# Altium PCB mainPCB.PcbDoc
Units mil, origin at the board's own origin, x right, y up, seen from the top; angles counter-clockwise.
Board outline 2370 x 3135 mil, 4 copper layers (Top Layer, +5, GND, Bottom Layer), stack 21.664 mil thick; 40 components, 38 nets, 179 pads, 68 vias.
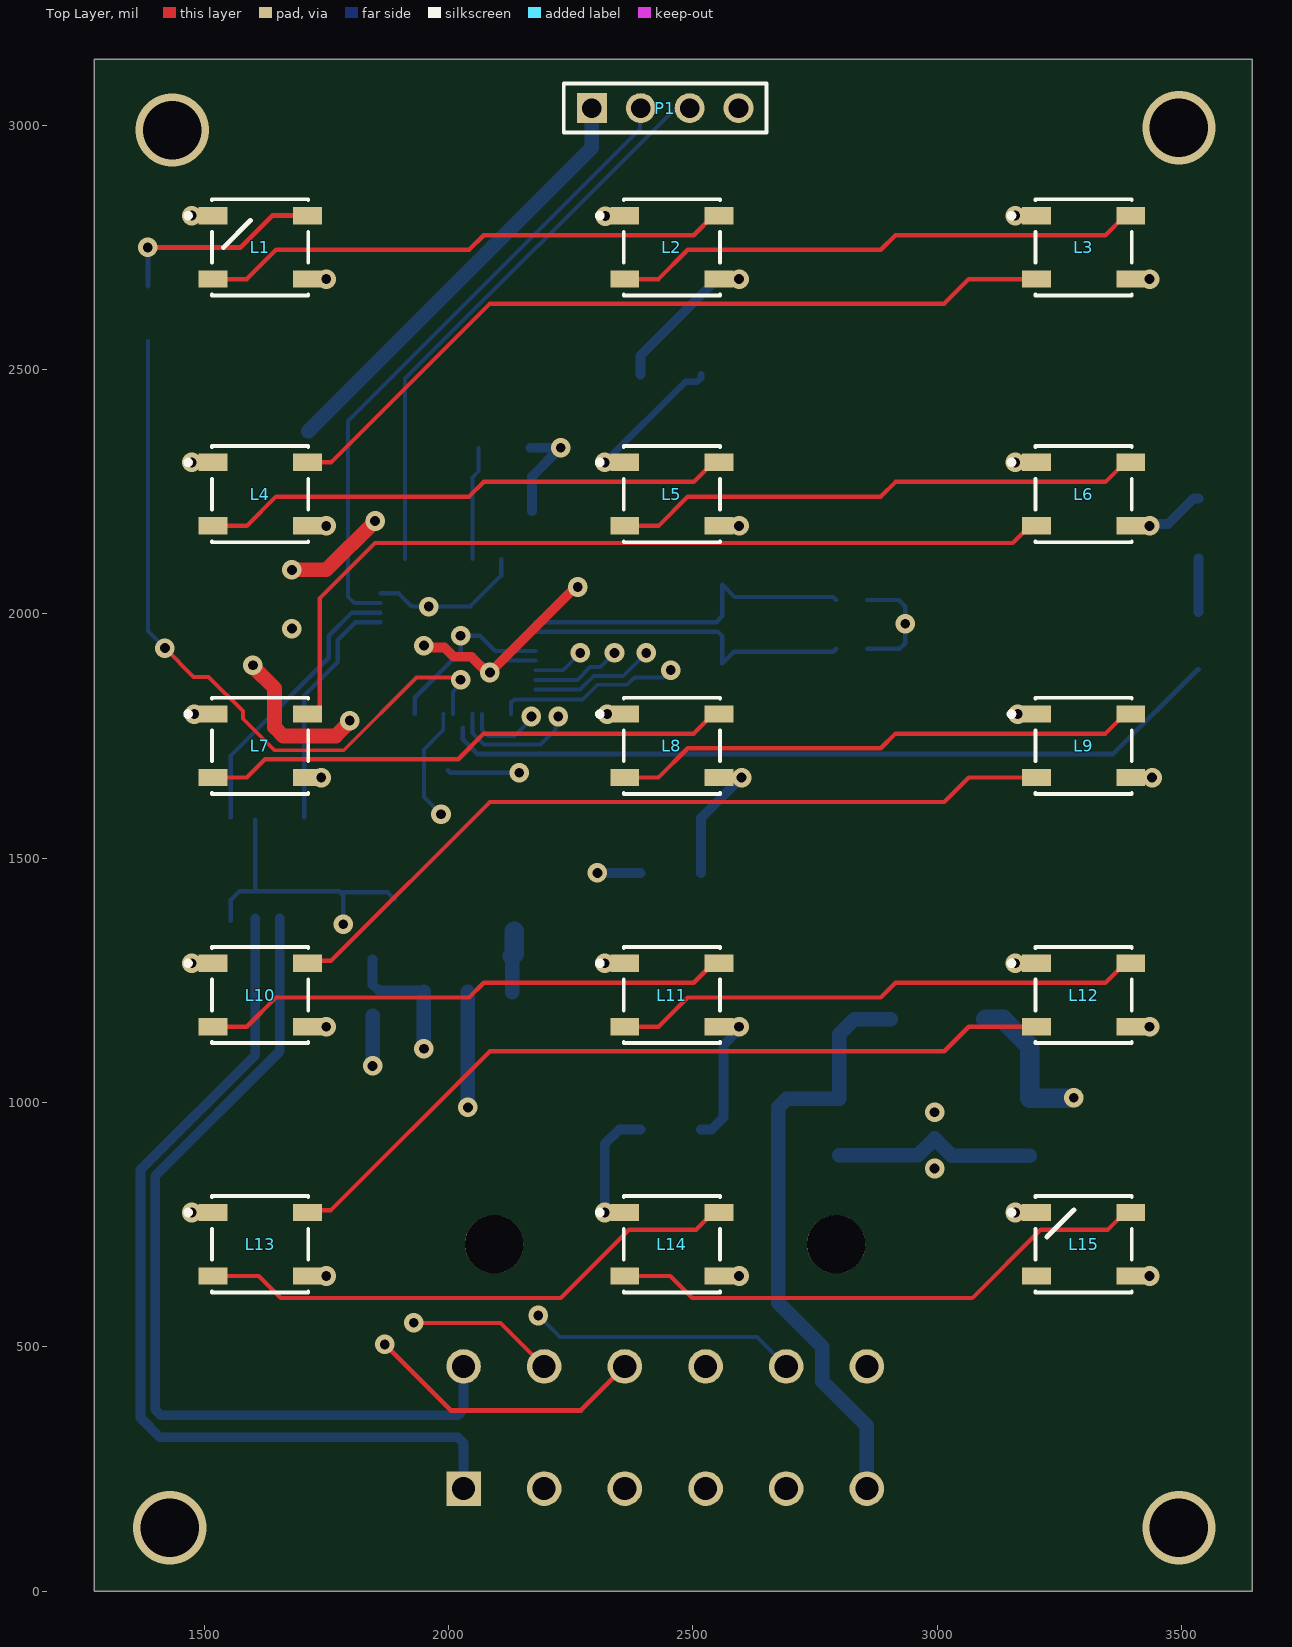
[diagram p0: Top Layer view]
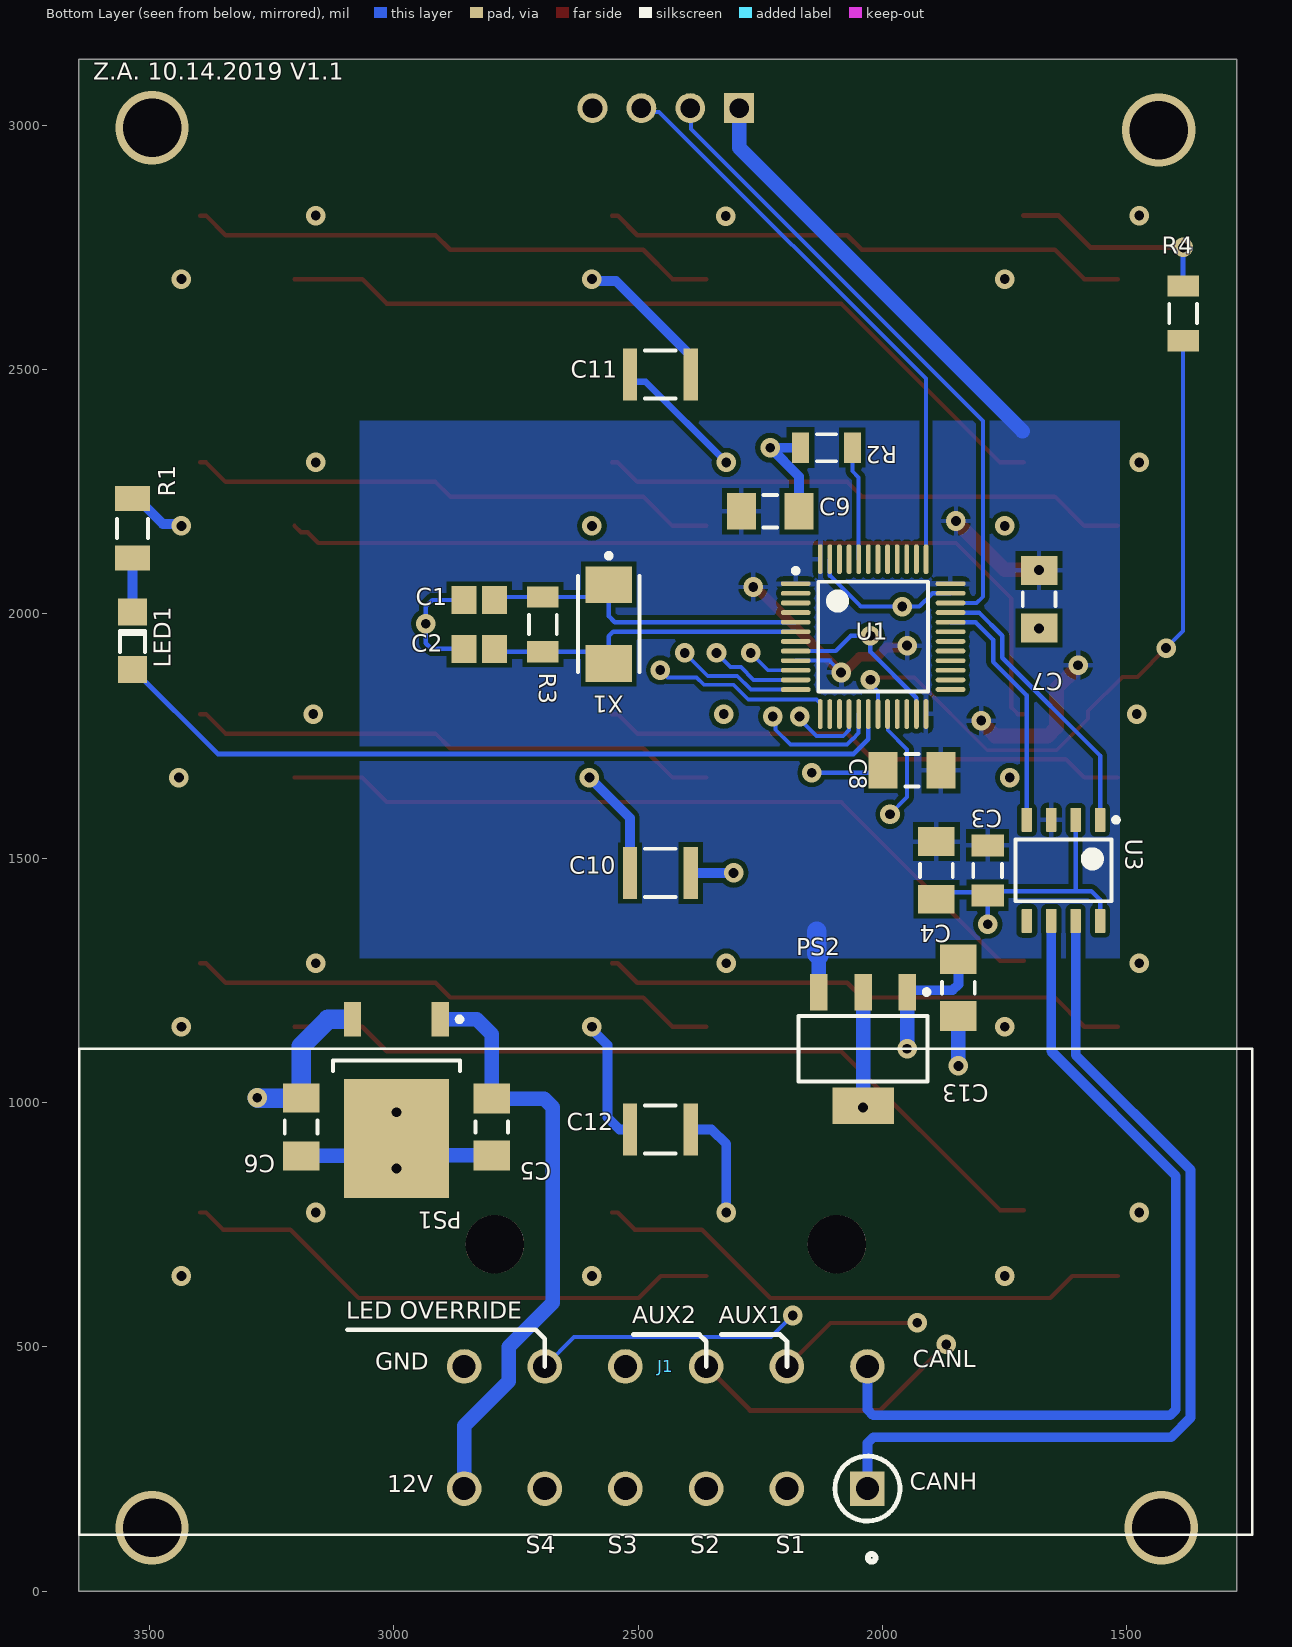
[diagram p1: Bottom Layer view, seen from below]
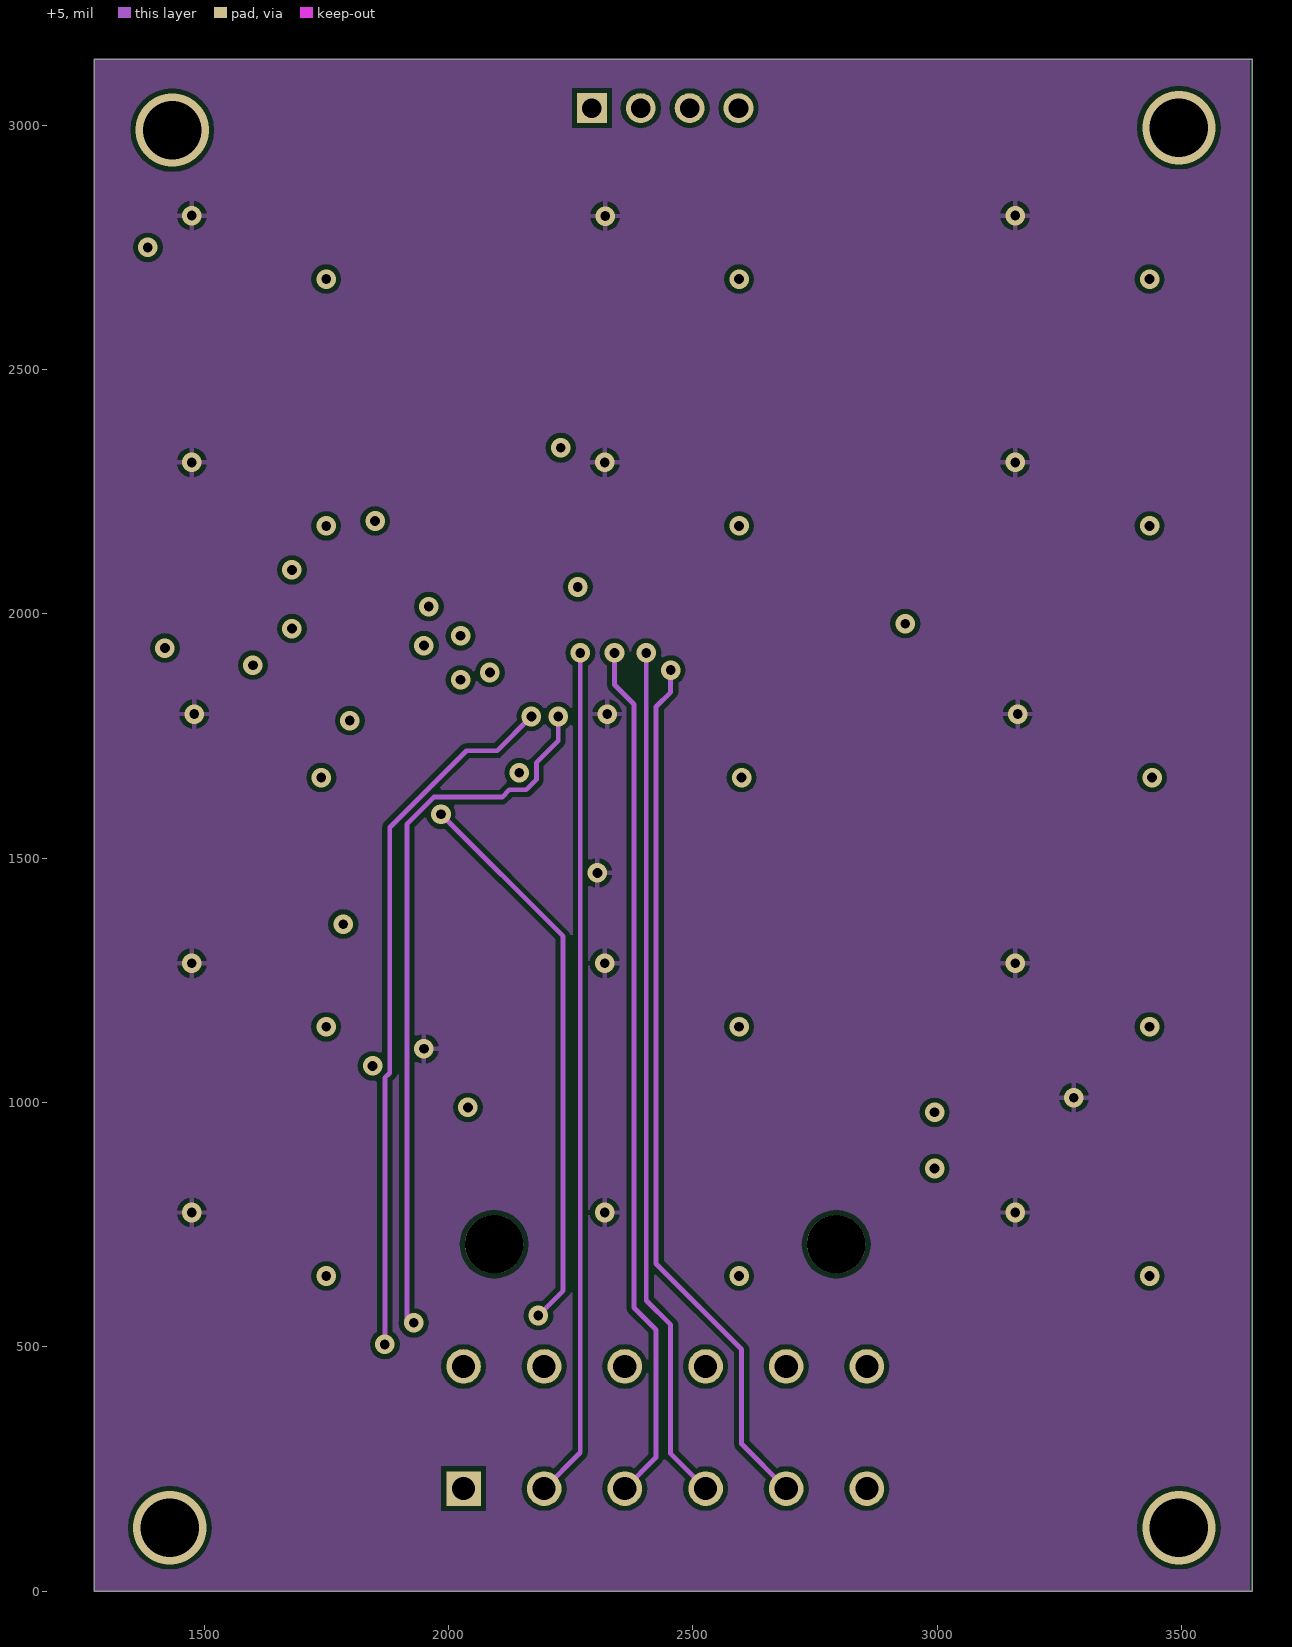
[diagram p2: +5]
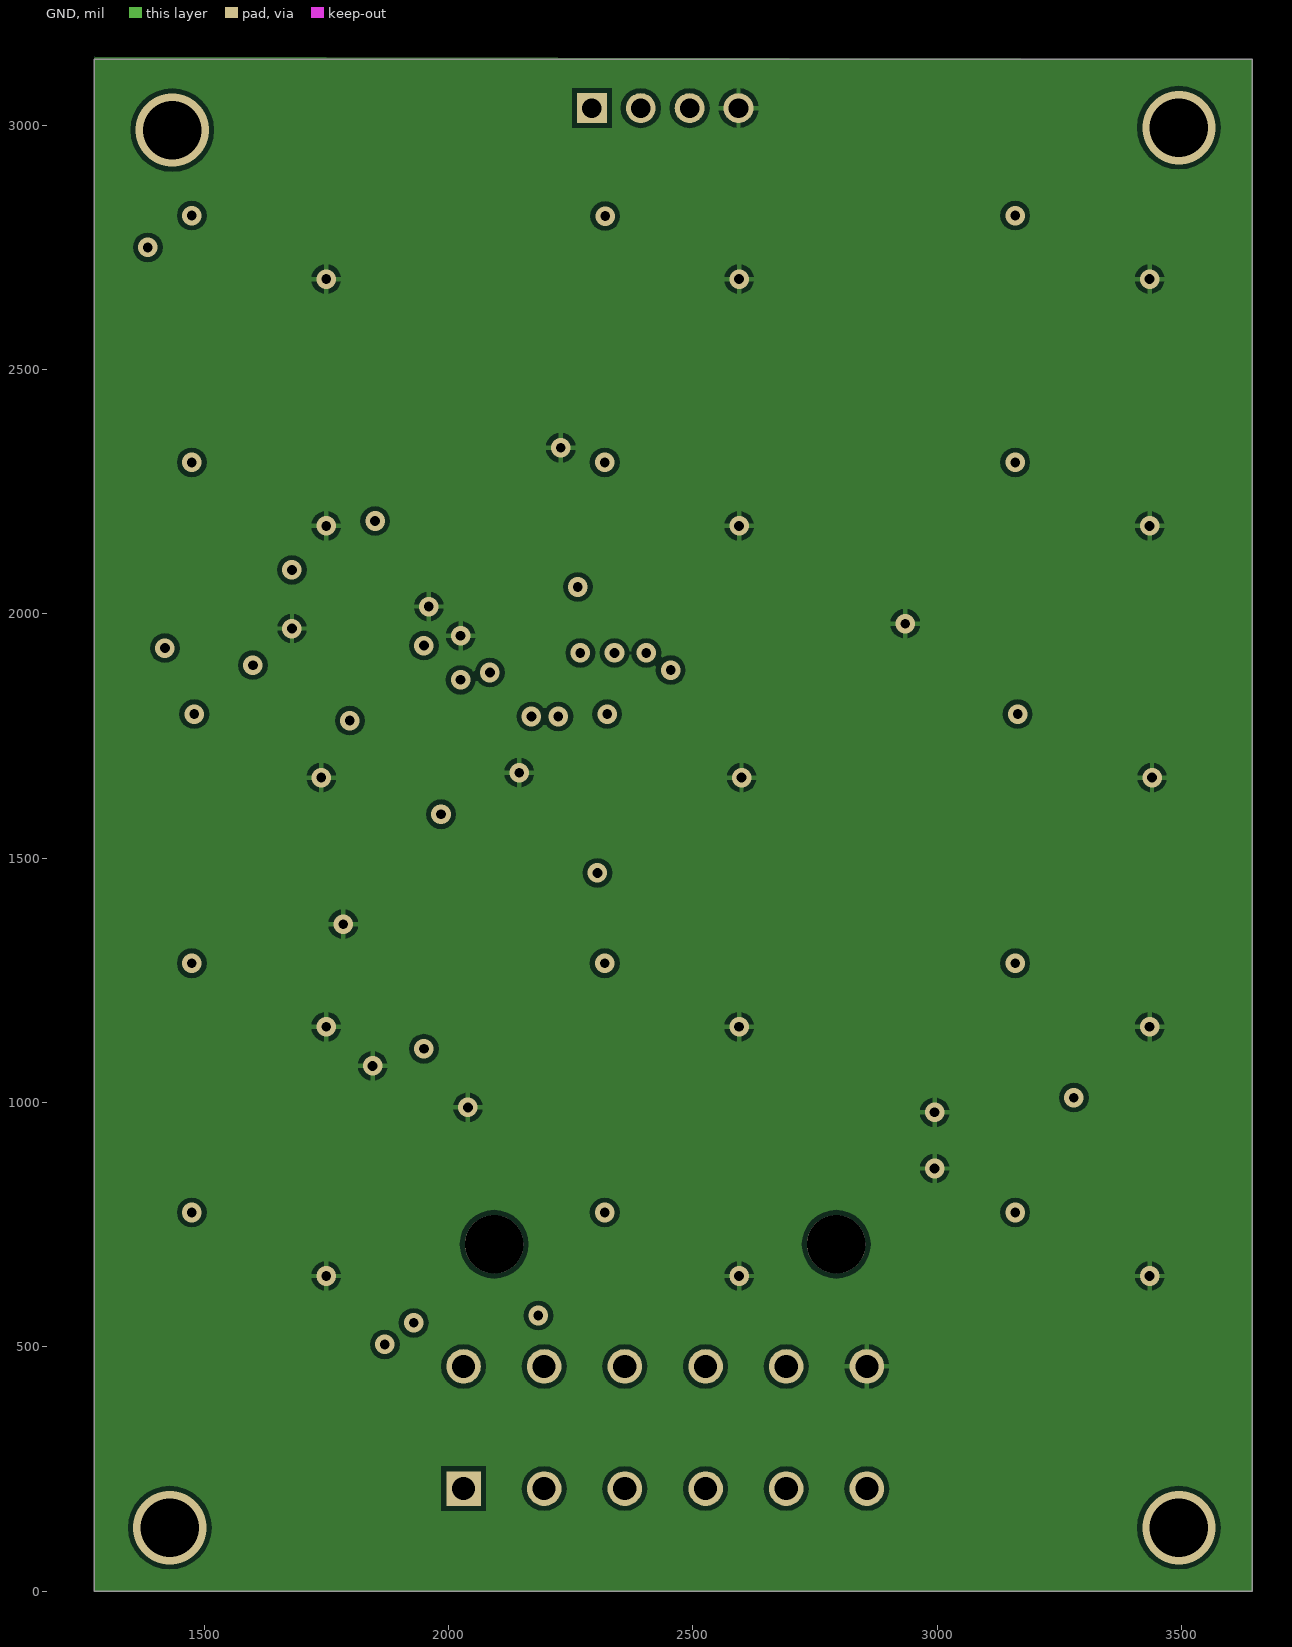
[diagram p3: GND]
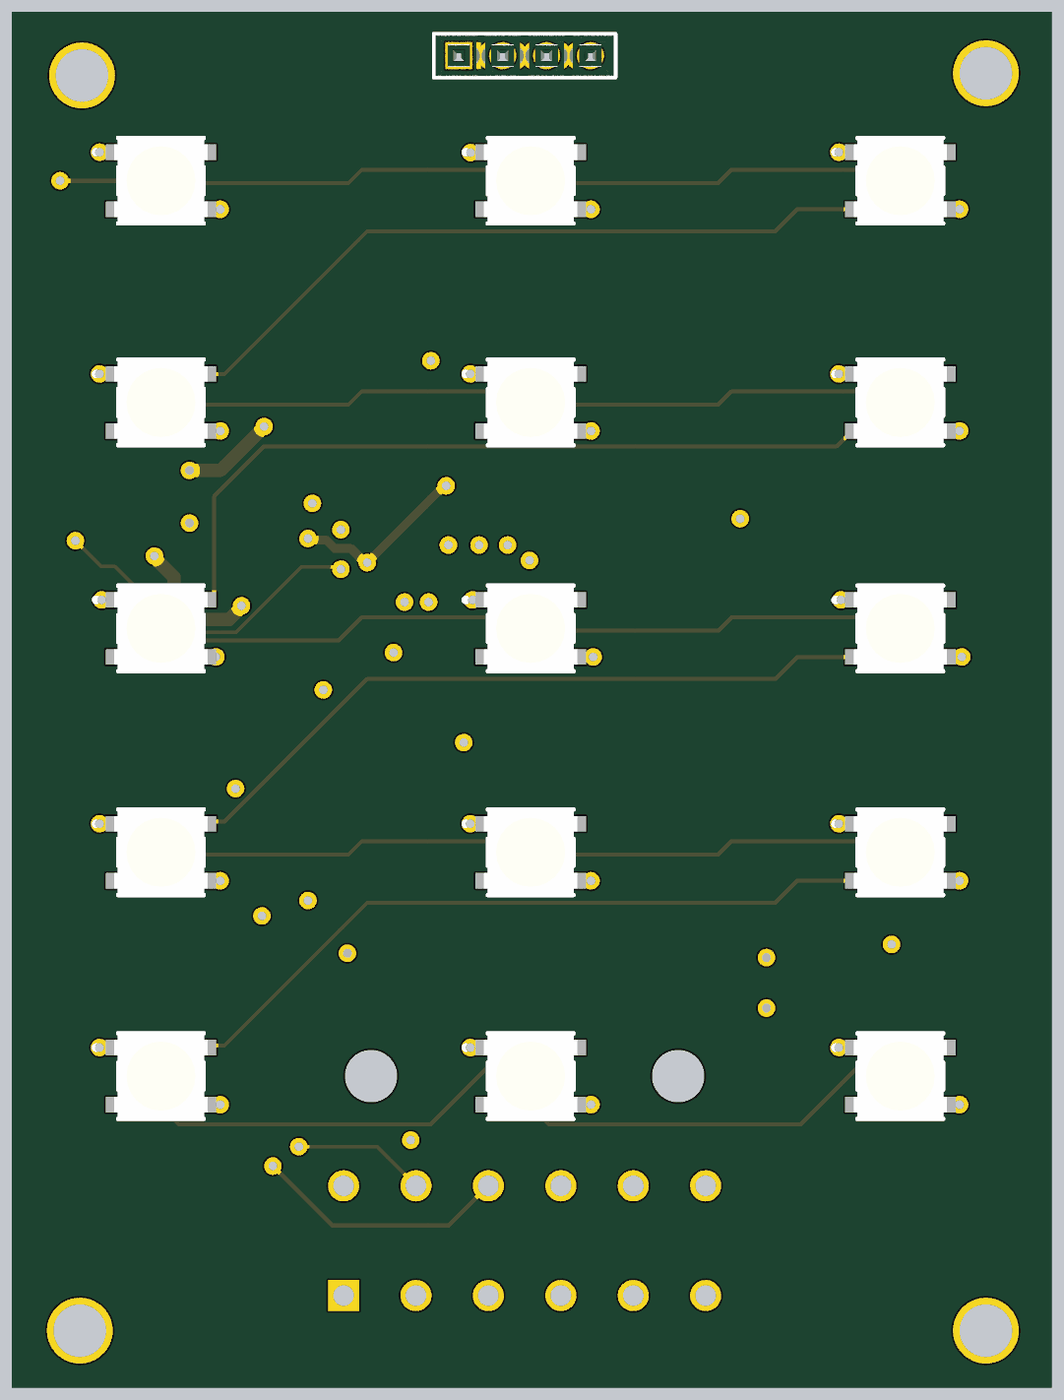
[diagram p4: 3D render of the assembled board from above, using the file's embedded part models]

## Layer stack, top to bottom
Top Solder: solder mask 0.4, Solder Resist, Dk 3.5
Top Layer: signal copper 0.354
Dielectric 2: prepreg 2.8, PP-006, Dk 4.1
+5: signal copper 1.378
Dielectric 1: dielectric 12.6, FR-4, Dk 4.8
GND: signal copper 1.378
Dielectric 3: prepreg 2.8, PP-006, Dk 4.1
Bottom Layer: signal copper 0.354
Bottom Solder: solder mask 0.4, Solder Resist, Dk 3.5

## Board outline
1275,0 3645,0 3645,3135 1275,3135

## Design rules (kind name [scope] priority, off if disabled: settings)
Clearance [All] p1: gap=10 ignorepadtopadclearanceinfootprint=TRUE except(0: Arc-Text Arc-Hole Track-Text Track-Hole SMDPad-Hole THPad-Hole Via-Hole Fill-Hole Poly-Hole Region-Hole Text-Hole)
ComponentClearance [All] p1 off: gap=10 collisioncheckmode=3 verticalgap=10 showdistances=FALSE
PolygonConnect [All] p1: connectstyle=Relief reliefconductorwidth=10 reliefentries=4 polygonreliefangle="90 Angle" airgapwidth=10
RoutingVias [All] p1: holewidth=20 width=40 viastyle="Through Hole" minholewidth=18 minwidth=38 maxholewidth=200 maxwidth=200
SilkToSilkClearance [All] p1 off: silktosilkclearance=10
SilkToSolderMaskClearance [IsPad] p1 off: minsilkscreentomaskgap=10 clearancetoexposedcopper=TRUE
SolderMaskExpansion [All] p1: expansion=4 istentingtop=FALSE
Width [All] p1: maxlimit=200 minlimit=1 preferedwidth=10 midlayer1_minwidth=10 midlayer1_maxwidth=10 midlayer2_minwidth=10 midlayer2_maxwidth=10 minimp=50.000000 maximp=50.000000 favimp=50.000000
27 further rules are at their usual default settings.

## Components (designator, comment, footprint, x,y, rotation, side; value= is the part's Value field where it differs from the comment)
C1 "08051A200JAT2A" CAPC2013X140X50NL20T25 2825.47,2028.46 r180 bottom
C2 "08051A200JAT2A" CAPC2013X140X50NL20T25 2825.47,1928.46 r180 bottom
C3 "GRM31MR71H105KA88L" CAPC3216X125X55LL15T25 1785,1475 r270 bottom
C4 "12065C104KAT2A" CAPC3216X94X50ML20T25 1890,1475 r270 bottom
C5 "10uF" MURA-1206_H_1.8_M 2800,950 r270 bottom
C6 "12065C104KAT2A" CAPC3216X94X50ML20T25 3190,950 r270 bottom
C7 "12065C104KAT2A" CAPC3216X94X50ML20T25 1680,2030 r270 bottom
C8 "12065C104KAT2A" CAPC3216X94X50ML20T25 1940,1680 r0 bottom
C9 "12065C104KAT2A" CAPC3216X94X50ML20T25 2230,2210 r180 bottom
C10 "CGA6M3X7S2A475K200AB" CAPC3225X220X20LL40 2455,1470 r0 bottom
C11 "CGA6M3X7S2A475K200AB" CAPC3225X220X20LL40 2455,2490 r180 bottom
C12 "CGA6M3X7S2A475K200AB" CAPC3225X220X20LL40 2455,945 r0 bottom
C13 "10uF" MURA-1206_H_1.8_M 1845,1235 r270 bottom
J1 "DTM13-12PA" *TE_DTM13-12PA 2443.75,710 r0 bottom locked
L1 "1655" ADA-RGB-1655_V 1615,2750.04 r0 top
L2 "1655" ADA-RGB-1655_V 2457.5,2750.04 r0 top
L3 "1655" ADA-RGB-1655_V 3300,2750.04 r0 top
L4 "1655" ADA-RGB-1655_V 1615,2245 r0 top
L5 "1655" ADA-RGB-1655_V 2457.5,2245 r0 top
L6 "1655" ADA-RGB-1655_V 3300,2245 r0 top
L7 "1655" ADA-RGB-1655_V 1615,1730.02 r0 top
L8 "1655" ADA-RGB-1655_V 2457.5,1730.02 r0 top
L9 "1655" ADA-RGB-1655_V 3300,1730.02 r0 top
L10 "1655" ADA-RGB-1655_V 1615,1220.01 r0 top
L11 "1655" ADA-RGB-1655_V 2457.5,1220.01 r0 top
L12 "1655" ADA-RGB-1655_V 3300,1220.01 r0 top
L13 "1655" ADA-RGB-1655_V 1615,710 r0 top
L14 "1655" ADA-RGB-1655_V 2457.5,710 r0 top
L15 "1655" ADA-RGB-1655_V 3300,710 r0 top
LED1 "150120GS75000" 1206_A 3535,1945 r270 bottom
P1 "TSW-104-08-G-S" SMTC-TSW-104-08-X-S 2293.75,3035 r0 top
PS1 "L78M05CDT-TR" TO-252_L 2995,1005 r270 bottom locked
PS2 "MCP1826S-3302E/DB" SOT-223-DB3_L 2040,1110 r270 bottom
R1 "CRCW1206200RFKEA" RESC3216X60X45ML10T20 3535,2175 r90 bottom
R2 "CRCW120610K0FKEA" RESC3216X60X45LL10T20 2115,2340 r0 bottom
R3 "ERJ-8ENF1004V" RESC3216X70X50NL05T20 2695.47,1978.46 r270 bottom
R4 "ERJ8ENF3000V" RESC3216X70X50NL05T20 1385,2615 r90 bottom
U1 "STM32F103C8T6" STM-LQFP48_L 2019.53,1953.46 r180 bottom
U3 "SN65HVD230DR" D0008A_L 1630,1475 r270 bottom
X1 "ABM3-8.000MHZ-D2Y-T" ABRA-ABM3-2_V 2560.47,1979.17 r270 bottom

## Footprints (in the part's own frame and the unit in brackets; to place one, negate y for a bottom-side part, rotate by r counter-clockwise, add the part's x,y. Pads: shape width x height; smd on the part's side, far side on the other; paste and mask are expansions set on the pad)
1206_A [mm] "Chip LED, 2-Leads, Body 3.2x1.6mm, IPC Medium Density"
  rect 1.4x1.5 smd: 1(-1.5,0) 2(1.5,0)
  silkscreen extent -0.5,-0.67 0.6,0.65, body extent -1.6,-0.8 1.6,0.8, height 0.68
*TE_DTM13-12PA [mm]
  rect 1.8x1.8 hole 1.2: 1(-10.48,12.7)
  round 1.8 hole 1.2: 2(-6.29,12.7) 3(-2.1,12.7) 4(2.1,12.7) 5(6.29,12.7) 6(10.48,12.7) 7(10.48,6.35) 8(6.29,6.35) 9(2.1,6.35) 10(-2.1,6.35) 11(-6.29,6.35) 12(-10.48,6.35)
  round 3.04 hole 3.04 unplated: None(-8.89,0) None(8.89,0)
  silkscreen extent -30.48,-10.16 30.48,16.5
ABRA-ABM3-2_V [mm] "SMD, 2-Leads, Body 5x3.2mm, Pitch 4.1mm"
  rect 1.9x2.4 smd: 1(-2.05,0) 2(2.05,0)
  silkscreen extent -3.67,-1.6 2.5,1.6, body extent -2.5,-1.6 2.5,1.6, height 1.3
ADA-RGB-1655_V [mm] "SMD, 4-Leads, Body 5x5mm"
  rect 1.5x0.9 smd: 1(-2.45,1.65) 2(-2.45,-1.65) 3(2.45,-1.65) 4(2.45,1.65)
  silkscreen extent -3.87,-2.5 2.5,2.5, body extent -2.7,-2.5 2.7,2.5, height 1.68
CAPC2013X140X50NL20T25 [mm] "Chip Capacitor, 2-Leads, Body 2.00x1.25mm, IPC Medium Density"
  rect 1.3x1.45 smd: 1(-0.8,0) 2(0.8,0)
  body extent -1.1,-0.72 1.1,0.72, height 1.4
CAPC3216X94X50ML20T25 [mm] "Chip Capacitor, 2-Leads, Body 3.20x1.60mm, IPC Low Density"
  rect 1.5x1.9 smd: 1(-1.5,0) 2(1.5,0)
  silkscreen extent -0.35,-0.85 0.35,0.85, body extent -1.7,-0.9 1.7,0.9, height 0.94
CAPC3216X125X55LL15T25 [mm] "Chip Capacitor, 2-Leads, Body 3.20x1.60mm, IPC High Density"
  rect 1.15x1.7 smd: 1(-1.3,0) 2(1.3,0)
  silkscreen extent -0.35,-0.75 0.35,0.75, body extent -1.68,-0.87 1.68,0.88, height 1.25
CAPC3225X220X20LL40 [mm] "Chip Capacitor, 2-Leads, Body 3.60x2.80mm, IPC High Density"
  rect 0.75x2.7 smd: 1(-1.575,0) 2(1.575,0)
  silkscreen extent -0.8,-1.25 0.8,1.25, body extent -1.8,-1.4 1.8,1.4, height 2.2
D0008A_L [mm] "SOIC, 8-Leads, Body 5x4mm, Pitch 1.27mm, IPC High Density"
  rrect18% 1.25x0.55 smd: 1(-2.625,1.905) 2(-2.625,0.635) 3(-2.625,-0.635) 4(-2.625,-1.905) 5(2.625,-1.905) 6(2.625,-0.635) 7(2.625,0.635) 8(2.625,1.905)
  silkscreen extent -2.75,-2.5 1.6,2.85, body extent -3,-2.45 3,2.45, height 1.63
MURA-1206_H_1.8_M [mm] "SMD, 2-Leads, Body 3.4x1.8mm, IPC Low Density"
  rect 1.55x1.9 smd: 1(-1.475,0) 2(1.475,0)
  silkscreen extent -0.3,-0.85 0.3,0.85, body extent -1.7,-0.9 1.7,0.9, height 1.8
RESC3216X60X45LL10T20 [mm] "Chip Resistor, 2-Leads, Body 3.20x1.60mm, IPC High Density"
  rect 0.9x1.6 smd: 1(-1.35,0) 2(1.35,0)
  silkscreen extent -0.5,-0.7 0.5,0.7, body extent -1.65,-0.85 1.65,0.85, height 0.6
RESC3216X60X45ML10T20 [mm] "Chip Resistor, 2-Leads, Body 3.20x1.60mm, IPC Low Density"
  rect 1.3x1.8 smd: 1(-1.55,0) 2(1.55,0)
  silkscreen extent -0.5,-0.8 0.5,0.8, body extent -1.65,-0.85 1.65,0.85, height 0.6
RESC3216X70X50NL05T20 [mm] "Chip Resistor, 2-Leads, Body 3.20x1.60mm, IPC Medium Density"
  rect 1.1x1.65 smd: 1(-1.425,0) 2(1.425,0)
  silkscreen extent -0.5,-0.72 0.5,0.72, body extent -1.63,-0.82 1.62,0.82, height 0.7
SMTC-TSW-104-08-X-S [mm] ".025 SQ Post Terminal Strip Assembly, 1x4 Pins, Vertical, 2.54mm Pitch, Male"
  rect 1.55x1.55 hole 1.02: 1(0,0)
  round 1.55 hole 1.02: 2(2.54,0) 3(5.08,0) 4(7.62,0)
  silkscreen extent -1.46,-1.27 9.08,1.27, body extent -1.27,-1.27 8.89,1.27, height 8.38
SOT-223-DB3_L [mm] "SOT223, 4-Leads, Body 6.5x3.5mm, Pitch 2.3mm, Lead Span 7mm, IPC High Density"
  rect 1.9x0.9 smd: 1(-2.95,2.3) 2(-2.95,0) 3(-2.95,-2.3)
  rect 1.9x3.2 smd: 4(2.95,0)
  silkscreen extent -3.07,-3.35 1.7,3.42, body extent -1.85,-3.35 1.85,3.35, height 1.8
STM-LQFP48_L [mm] "QFP, 48-Leads, Body 7x7mm, Pitch 0.5mm, IPC High Density"
  oval 1.55x0.25 smd: 1(-4.025,2.75) 2(-4.025,2.25) 3(-4.025,1.75) 4(-4.025,1.25) 5(-4.025,0.75) 6(-4.025,0.25) 7(-4.025,-0.25) 8(-4.025,-0.75) 9(-4.025,-1.25) 10(-4.025,-1.75) 11(-4.025,-2.25) 12(-4.025,-2.75) 25(4.025,-2.75) 26(4.025,-2.25) 27(4.025,-1.75) 28(4.025,-1.25) 29(4.025,-0.75) 30(4.025,-0.25) 31(4.025,0.25) 32(4.025,0.75) 33(4.025,1.25) 34(4.025,1.75) 35(4.025,2.25) 36(4.025,2.75)
  oval 0.25x1.55 smd: 13(-2.75,-4.025) 14(-2.25,-4.025) 15(-1.75,-4.025) 16(-1.25,-4.025) 17(-0.75,-4.025) 18(-0.25,-4.025) 19(0.25,-4.025) 20(0.75,-4.025) 21(1.25,-4.025) 22(1.75,-4.025) 23(2.25,-4.025) 24(2.75,-4.025) 37(2.75,4.025) 38(2.25,4.025) 39(1.75,4.025) 40(1.25,4.025) 41(0.75,4.025) 42(0.25,4.025) 43(-0.25,4.025) 44(-0.75,4.025) 45(-1.25,4.025) 46(-1.75,4.025) 47(-2.25,4.025) 48(-2.75,4.025)
  silkscreen extent -4.15,-2.85 2.85,3.55, body extent -3.5,-3.5 3.5,3.5, height 1.6
TO-252_L [mm] "D-PAK, 4-Leads, Body 6.1x6.5mm, Pitch 2.28mm, Lead Span 9.7mm, IPC High Density"
  rect 1.8x0.9 smd: 1(-4.2,2.28) 3(-4.2,-2.28)
  rect 6.2x5.45 smd: 4(2,0)
  silkscreen extent -4.32,-3.3 -1.5,3.4, body extent -2.05,-3.3 4.15,3.3, height 2.4

## Part data
C1 C2: library part CMP-2007-04537-1, Manufacturer="AVX Interconnect / Elco", Part Number=08051A200JAT2A
C3: library part CMP-2000-06356-1, "Chip Capacitor, 1 uF, +/- 10%, 50 V, -55 to 125 degC, 1206 (3216 Metric), RoHS, Tape and Reel", Capacitance=1uF, Case Code - in=1206, Case Code - mm=3216, Case Height=1.15mm, Case Length=3.2mm, Case Width=1.6mm, Dielectric=X7R, Manufacturer=Murata, Maximum Operating Temperature=+125C, Minimum Operating Temperature=-55C, Package / Case=1206(3216metric), Package Description="2-Pin Surface Mount Device, Body 3.2 x 1.6 mm", Tolerance=10%, Voltage Rating DC=50V, Brand=MurataElectronics, Datasheet URL=http://search.murata.co.jp/Ceramy/image/img/A01X/G101/ENG/GRM31MR71H105KA88-01.pdf, Datasheet Version=03/2016, Factory Pack Quantity=3000, Manufacturer URL=http://www.murata.com/, Mounting Technology=SurfaceMount, Package Reference=1206, Packaging=Reel, Product=GeneralTypeMLCCs, Product Category=MultilayerCeramicCapacitorsMLCC-SMD/SMT, RoHS=Details, Series=GRM, Termination Style=SMD/SMT, Type=GeneralPurposeMLCC
C4 C6 C7 C8 C9: library part CMP-2000-05018-1, "Chip Capacitor, Ceramic, 100 nF, 10%, 50 V, 1206, RoHS, Tape and Reel", Capacitance=100nF, Case Size/Dimension=1206, Dielectric=X7R, Manufacturer=AVX, Rated Voltage=50V, Tolerance (%)=±10%, Datasheet URL=http://www.mouser.com/ds/2/40/cauto-360.pdf, Datasheet Version=Sep-14, Manufacturer URL=http://www.avx.com/
C5 C13: library part CMP-2000-05256-1, "CAP, Ceramic, 10 uF, 10%, 50 V, 1206, RoHS, Tape and Reel", Case Code - in=1206, Case Code - mm=3216, Case Height=1.6mm, Case Length=3.2mm, Dielectric=X5R, Manufacturer=Murata, Maximum Operating Temperature=+85C, Minimum Operating Temperature=-55C, Package / Case=1206(3216metric), Tolerance=10%, Voltage Rating DC=50V, Brand=MurataElectronics, Capacitance=10uF, Case Width=1.6mm, Datasheet URL=http://download.siliconexpert.com/pdfs/2015/11/6/15/23/32/328/mrt_/manual/2905595417290350grm31cr61h106ka1223.pdf, Datasheet Version=Nov-15, Factory Pack Quantity=2000, Manufacturer URL=http://www.murata.com/, Packaging=Reel, Product=GeneralTypeMLCCs, Product Category=MultilayerCeramicCapacitorsMLCC-SMD/SMT, RoHS=Details, Series=GRM, Termination Style=SMD/SMT, Type=GeneralPurposeMLCC
C10 C11 C12: library part CMP-2000-07583-1, "Chip Capacitor, 4.7 uF, +/- 10%, 100 V, -55 to 125 degC, 1210 (3225 Metric), RoHS, Tape and Reel", Capacitance=4.7uF, Case Code (Imperial)=1210, Case Code (Metric)=3225, Dielectric=X7S, Manufacturer=TDK, Max Operating Temperature=125degC, Min Operating Temperature=-55degC, Package Description="2-Pin Surface Mount Device, Body 3.2 x 2.5 mm", Package Quantity=1, Tolerance=10%, Voltage Rating=100V, Case/Package=1210, Composition=Ceramic, Datasheet URL=https://product.tdk.com/info/en/catalog/datasheets/mlcc_automotive_midvoltage_en.pdf, Datasheet Version=03/2015, Depth=2.5mm, Height=2mm, Lead Free=LeadFree, Length=3.2mm, Manufacturer URL=http://www.tdk.com/, Mount=SurfaceMount, Mounting Technology=SurfaceMount, Package Reference=3225, Packaging=TapeandReel, Radiation Hardening=No, REACH SVHC=NoSVHC, RoHSCompliant=True, Termination=SMD/SMT, Thickness=0.087inch, Voltage Rating (DC)=100V, Weight=0.000564oz, Width=0.098inch
J1: "12 way DTM13 A key Receptacle with PCB mount and 90 degree molded pins. Sealable, with centerline pitch .165 inch/4 millimeters. Gray.", Package=None, Availability=Unavailable, EU_RoHS_Compliance=Compliant, MF="TE Connectivity", MP=DTM13-12PA, Price=None, SnapEDA_Link=https://www.snapeda.com/parts/DTM13-12PA/TE%20Connectivity%20Deutsch%20Connectors/view-part/?ref=snap, TE_purchase_URL=https://www.te.com/usa-en/product-DTM13-12PA.html?te_bu=Cor&te_type=disp&te_campaign=seda_glo_cor-seda-global-disp-prtnr-fy19-seda-model-bom-cta_sma-317_1&elqCampaignId=32493
L1 L2 L3 L4 L5 L6 L7 L8 L9 L10 L11 L12 L13 L14 L15: library part CMP-2000-05026-1, "Intelligent Control LED Integrated Light Source, 3.5 to 5.3 V, -25 to 80 degC, 4-Pin SMD, RoHS, Tape and Reel", Color=Red,Green,Blue(RGB), Manufacturer=Adafruit-Industries-LLC, Package Description="4-Pin Surface Mount Device, Body 5 x 5 mm", Category=Optoelectronics, Configuration=Discrete, Controller Type=-, Datasheet URL=http://datasheet.octopart.com/ADA1655-Adafruit-Industries-datasheet-32028139.pdf, Datasheet Version=May-13, Family=Addressable,Specialty, Interface=-, Manufacturer URL=https://www.adafruit.com/, Mounting Type=SurfaceMount, Number of LEDs=10, Package Reference=1655, Series=Neopixel, Size / Dimension=5.00mmLx5.00mmW, Utilized LED=WS2812(5050)
LED1: library part CMP-1426-00014-1, "SMD mono-color Chip LED, WL-SMCW, Green", Color=Green, Manufacturer="Wuerth Elektronik", ComponentLink1Description="Manufacturer URL", ComponentLink1URL=http://www.we-online.com, ComponentLink2Description=Datasheet, ComponentLink2URL=http://katalog.we-online.com/led/datasheet/150120GS75000.pdf, PackageReference=1206_A, PartNumber=150120GS75000
P1: library part CMP-1024-00357-1, "0.025\" SQ Post Header, Through-hole, Vertical, -55 to 125 degC, 2.54 mm Pitch, 4-Pin, Male, RoHS", Manufacturer=Samtec, Temperature Range="-55 to 125 degC", ComponentLink1Description="Manufacturer URL", ComponentLink1URL=http://www.samtec.com, ComponentLink2Description=Datasheet, ComponentLink2URL=http://www.samtec.com/documents/webfiles/pdf/TSW_TH.PDF, ComponentLink3Description="Package Specification", ComponentLink3URL=http://www.samtec.com/documents/webfiles/cpdf/TSW-XXX-XX-XXX-X-XX-XXX-MKT.pdf, DatasheetVersion=F-214, Mounting Technology=Through-hole, Orientation=Vertical, PackageDescription=".025[0.64] SQ. Post Terminal Strip Assembly", PackageReference=TSW-104-08-X-S, PackageVersion="DM, 8/1988", PartNumber=TSW-104-08-G-S, Pitch="2.54 mm", RoHS=True
PS1: library part CMP-0244-00178-1, "Positive Voltage Regulator, 5V, 3-Pin DPAK, Tape and Reel", ComponentLink1Description="Manufacturer URL", ComponentLink1URL=http://www.st.com, ComponentLink2Description=Datasheet, ComponentLink2URL=http://www.st.com/internet/com/TECHNICAL_RESOURCES/TECHNICAL_LITERATURE/DATASHEET/CD00000447.pdf, DatasheetVersion=1/11/2010, PackageDescription="3-Pin Transistor Outline Package 2.28 mm Pitch, 9.7 mm Lead Span (DPAK)", PackageReference=TO-252, PackageVersion=2011
PS2: library part CMP-0136-00504-1, "1000 mA, Low Voltage, Low Quiescent Current LDO Regulator, 3-Pin SOT-223, Extended Temperature", DatasheetVersion="revA, Aug-2007", PackageDescription="3-Lead Plastic Small Outline Transistor (DB) [SOT-223]", PackageReference=SOT-223-DB3, PackageVersion="revBB, Aug-2009"
R1: library part CMP-2003-01935-1, Manufacturer="Vishay Dale", Part Number=CRCW1206200RFKEA
R2: library part CMP-2003-04807-1, Manufacturer="Vishay Dale", Part Number=CRCW120610K0FKEA
R3: library part CMP-2003-00020-1, Manufacturer=Panasonic, Part Number=ERJ-8ENF1004V
R4: library part CMP-2003-00831-1, Manufacturer=Panasonic, Part Number=ERJ8ENF3000V
U1: library part CMP-0237-00215-3, "ARM Cortex-M3 32-bit MCU, 64 KB Flash, 20 KB Internal RAM, 37 I/Os, 48-pin LQFP, -40 to 85 degC, Tray", I/Os (High Current)=37, Operating Frequency(F) (Processor speed) (MHz)=72, Supply Voltage(Vcc) min (V)=2, A/D Converter="2x12-bit (10 Channel)", ComponentLink1Description="Manufacturer URL", ComponentLink1URL=http://www.st.com/web/en/home.html, ComponentLink2Description=Datasheet, ComponentLink2URL=http://www.st.com/st-web-ui/static/active/en/resource/technical/document/datasheet/CD00161566.pdf, ComponentLink3Description="Package Specification", ComponentLink3URL=http://www.st.com/st-web-ui/static/active/en/resource/technical/document/datasheet/DM00058181.pdf, Core="ARM Cortex-M3", DatasheetVersion="Rev. 16", FLASH Size (Prog) (kB)=64, Internal RAM Size (kB)=20, Mounting Technology="Surface Mount", PackageDescription="48-Pin Low Profile Quad Flat Package, 7 x 7 mm Body, 0.5 mm Pitch", PackageReference=LQFP48, PackageVersion="Rev. 6, 06/2013", Packing=Tray, PartNumber=STM32F103C8T6
U3: library part CMP-0315-00015-2, "3.3V CAN Transceiver with Standby Mode, 17 mA, -40 to 85 degC, 8-pin SOIC (D), Green (RoHS & no Sb/Br)", Drivers Per Package=1, Low Power Mode=Standby, Manufacturer="Texas Instruments", Rating=Catalog, Supply Voltage(s)(V)=3.3, Code_JEDEC=MS-012AA, ComponentLink1Description=Datasheet, ComponentLink1URL=http://www.ti.com/general/docs/lit/getliterature.tsp?genericPartNumber=SN65HVD230&fileType=pdf, DatasheetVersion=SLOS346K, Eco-Plan="Green (RoHS & no Sb/Br)", ICC(Max)(mA)=17, Isolated=No, Mounting Technology="Surface Mount", PackageDescription="8-Pin Plastic Small Outline Integrated Circuit, 4.9 x 3.9 mm, Pitch 1.27 mm Pitch", PackageReference=D0008A, PackageVersion="revM, Jun-2011", PartNumber=SN65HVD230DR, Receivers Per Package=1, SubFamily=CAN, Transient Pulse Protection(V)="-25 to 25"
X1: library part CMP-2000-05033-1, "Miniature Ceramic Crystal, 8 MHz, -40 to 85 degC, 2-Pin SMD, RoHS, Tape and Reel", Case Height=1.3mm, Case Length=5mm, Case Width=3.2mm, Frequency=8MHz, Frequency Stability=30PPM, Load Capacitance=18pF, Manufacturer=ABRACON, Operating Temperature Range=-40Cto+85C, Package / Case=5mmx3.2mm, Package Description="2-Pin Surface Mount Device, Body 5 x 3.2 mm", Package Reference=ABM3-2, Tolerance=20PPM, Brand=ABRACON, Datasheet URL=http://www.farnell.com/datasheets/1754353.pdf, Datasheet Version=Sep-13, Dimensions=3.2mmWx5mmLx1.3mmH, ESR=140Ohms, Factory Pack Quantity=1000, Manufacturer URL=http://www.abracon.com/, Mounting Style=SMD/SMT, Package URL=http://www.abracon.com/Support/PackageDrawing/Resonators/ABM3.PDF, Packaging=Reel, Product Category=Crystals, RoHS=Details, Series=ABM3, Termination Style=SMD/SMT, Type=MiniatureCeramicCrystal

## Via types
v1: diameter 40, hole 20, Top Layer to Bottom Layer, 64 vias
v2: diameter 150, hole 120, Top Layer to Bottom Layer, 4 vias

## Nets (pads, with @x,y where several pads share a name; then routed paths per layer and width w, separated by ;. In a path a pad name is that pad's centre, name@x,y a point inside that pad or via, vN(x,y) a via of type N, cw(c..) or ccw(c..) an arc to the next point about the centre after c; other vN are vias at no path point)
3V3: C3.1 C4.1 C7.1 C8.1 C9.1 P1.1 PS2.3 U1.1 U1.9 U1.24 U1.36 U1.48 U3.3 | length 2074.1
  Top Layer w20: v1(1950,1935) 1953.83,1931.17 1992.26,1931.17 2011.32,1912.11 2047.48,1912.11 2079.59,1880 v1(2085,1880) 2260,2055 v1(2265,2055)
  Top Layer w30: v1(1600,1895) 1600,1892.29 1644.34,1847.95 1644.34,1767.57 1661.91,1750 1770,1750 1770,1750.38 1798.46,1778.84 v1(1798.46,1781.54) ; v1(1680,2090) 1750,2090 v1(1850,2190)
  Bottom Layer w8: v1(2085,1880) 2109.25,1904.25 U1.9
  Bottom Layer w30: 1713.67,2373.67 2293.75,2953.75 P1.1 ; PS2.3 2130.55,1300.55
  Bottom Layer w40: 2130.55,1300.55 2135,1305 2135,1350
+5: C6.1 C10.1 C11.1 C12.1 C13.1 L1.1 L2.1 L3.1 L4.1 L5.1 L6.1 L7.1 L8.1 L9.1 L10.1 L11.1 L12.1 L13.1 L14.1 L15.1 PS1.3 PS2.1 | length 1177.1
  Bottom Layer w14: v1(2320,2310) 2485,2475 2509.24,2475 2517.01,2482.76 C11.1
  Bottom Layer w20: C13.1 1845,1241.72 1856.72,1230 1941.73,1230 1945.59,1226.14 PS2.1 ; v1(2305,1470) C10.1 ; v1(2320,775) 2320,915 2350,945 C12.1
  Bottom Layer w30: PS2.1 1949.72,1225.87 1949.72,1110.28 v1(1950,1110)
  Bottom Layer w40: PS1.3@3100,1170.35 3110,1170.35 3110.35,1170 3135,1170 3190,1115 C6.1 3279.06,1009.06 v1(3280,1010)
  other v1: 1475,775 3160,775 1475,1285 2320,1285 3160,1285 1480,1795 2325,1795 3165,1795 1475,2310 3160,2310 2320.92,2814.08 1475,2815 3160,2815
+12: C5.1 J1.6 PS1.1 | length 1237.6
  Bottom Layer w30: J1.6 2856.35,338.65 2765,430 2765,500 2675,590 2675,990.5 2692.57,1008.07 C5.1 2800,1140 2830.35,1170.35 PS1.1
AUX1: J1.11 U1.17 | length 2033.5
  Top Layer w8: v1(1929.13,549.15) 1933.28,545 1937.42,549.15 2106.97,549.15 J1.11
  +5 w10: v1@1915,555 1915,1569.5 1970.5,1625 2110,1625 2125,1640 2159.5,1640 2180,1660.5 2180,1695 2225,1740 v1(2225,1790)
  Bottom Layer w8: U1.17 2049.06,1755.94 2061,1744 2061.62,1744 2073.13,1732.49 2188.49,1732.49 2218.88,1762.88 2218.88,1783.88 v1(2225,1790)
AUX2: J1.10 U1.16 | length 2188.5
  Top Layer w10: v1(1870,505) 2005,370 2271.07,370 J1.10
  +5 w10: v1(1870,505) 1870,1050.5 1880,1060.5 1880,1562.78 2037.22,1720 2100,1720 v1(2170,1790)
  Bottom Layer w8: U1.16 2069.09,1794.65 2069.09,1761.98 2080.59,1750.49 2135.63,1750.49 2170,1784.86 v1(2170,1790)
CANH: J1.1 U3.7 | length 1894.9
  Bottom Layer w20: U3.7@1605,1376.65 1605,1097.43 1370,862.43 1370,355 1410,315 2019.44,315 2031.15,303.28 J1.1
CANL: J1.12 U3.6 | length 1839.7
  Bottom Layer w20: U3.6@1655,1376.65 1655,1105 1400,850 1400,371.72 1411.72,360 2019.44,360 2031.15,371.72 J1.12
CANRXD: U1.32 U3.4 | length 494.3
  Bottom Layer w9: U3.4@1705,1583.35 1705,1833.13 1774,1902.13 1774,1947.13 1809.86,1982.99 U1.32
CANTXD: U1.33 U3.1 | length 580.3
  Bottom Layer w9: U3.1@1555,1583.35 1555,1710 1755,1910 1755,1955 1802.68,2002.68 U1.33
GND: C1.1 C2.1 C3.2 C4.2 C5.2 C6.2 C7.2 C8.2 C9.2 C10.2 C11.2 C12.2 C13.2 J1.7 L1.3 L2.3 L3.3 L4.3 L5.3 L6.3 L7.3 L8.3 L9.3 L10.3 L11.3 L12.3 L13.3 L14.3 L15.3 P1.4 PS1.4 PS2.2 PS2.4 R1.2 R2.2 U1.8 U1.23 U1.35 U1.47 U3.2 U3.8 | length 3554.7
  Bottom Layer w9: U3.8 1555,1414.73 1572.77,1432.5 1602.5,1432.5 ; U3.2 1605,1435 1602.5,1432.5 ; v1(1785,1365) C3.2 1776.32,1432.5 1602.5,1432.5 ; C3.2@1785,1430 1875.94,1430 C4.2 ; U1.35 1861.22,2041.89 1898.11,2041.89 1925,2015 v1(1960,2015) 2044.55,2015 2107.95,2078.4 2107.95,2111.77 U1.47 ; U1.23 1931.11,1795.16 1931.11,1828.53 2025,1922.43 v1(2025,1955) 2065,1955 2096.06,1923.94 U1.8 ; C8.2 2004.06,1675 v1(2145,1675) ; C2.1 2923.46,1928.46 2935,1940 v1(2935,1980) 2935,2015 2921.54,2028.46 C1.1
  Bottom Layer w20: R2.2 v1(2230,2340) 2170.94,2280.94 C9.2 ; C11.2 2392.99,2528.39 2545.78,2681.17 2591.17,2681.17 v1(2595,2685) ; C12.2 2538.28,945 2562.89,969.6 2562.89,1117.48 2595,1149.59 v1(2595,1155) ; C10.2 2517.01,1582.01 v1(2600,1665) ; v1(3435,2180) 3438.83,2183.83 3472.96,2183.83 3525.16,2236.02 R1.2
  Bottom Layer w30: v1(1845,1075) C13.2 ; PS2.4 PS2.2 ; C5.2 2960.67,891.93 PS1.4 3030.31,890.94 C6.2
  other v1: 1750,645 2595,645 3435,645 2995,865 2995,980 2040,990 1750,1155 3435,1155 1740,1665 3440,1665 1680,1970 1750,2180 2595,2180 1750,2685 3435,2685
LED_DATA: R4.1 U1.19 | length 1484.2
  Top Layer w8: v1(1420,1930) 1478.81,1871.19 1509.38,1871.19 1579.64,1800.93 1579.64,1785.36 1644,1721 1786,1721 1935,1870 2020,1870 v1(2025,1865)
  Bottom Layer w8: R4.1 1385,1965 v1(1420,1930) ; U1.19 2009.68,1841.03 2025,1856.34 v1(2025,1865)
LED_OVERRIDE: J1.8 U1.20 | length 1921.5
  +5 w10: v1(1985,1590) 2235,1340 2235,615 v1@2195,575
  Bottom Layer w8: v1(1985,1590) 1950,1625 1950,1722.34 1989.65,1761.98 1989.65,1794.65 U1.20 ; v1(2184.19,564.19) 2228.37,520 2631.39,520 J1.8
NetC1_2: C1.2 R3.1 U1.5 X1.1 | length 698.6
  Bottom Layer w9: U1.5 2547.99,1982.99 2560.47,1995.47 X1.1 2585.79,2034.57 R3.1 2787.87,2034.57 C1.2
NetC2_2: C2.2 R3.2 U1.6 X1.2 | length 688.1
  Bottom Layer w9: U1.6 2551.69,1963.31 2560.47,1954.53 X1.2 2584.37,1922.36 R3.2 2787.87,1922.36 C2.2
NetL1_2: L1.2 L2.4 | length 1089.2
  Top Layer w9: L1.2 1587.58,2685.08 1647.5,2745 2042.5,2745 2072.5,2775 2502.15,2775 2542.15,2815 L2.4
NetL1_4: L1.4 R4.2 | length 432.3
  Top Layer w10: v1(1385,2750) 1575,2750 1640,2815 L1.4
  Bottom Layer w10: R4.2 v1(1385,2750)
NetL2_2: L2.2 L3.4 | length 1089.2
  Top Layer w9: L2.2 2430.08,2685.08 2490,2745 2885,2745 2915,2775 3344.65,2775 3384.65,2815 L3.4
NetL3_2: L3.2 L4.4 | length 1647.5
  Top Layer w9: L4.4 1759.96,2309.96 2085,2635 3015,2635 3065.08,2685.08 L3.2
NetL4_2: L4.2 L5.4 | length 1089.2
  Top Layer w9: L4.2 1587.58,2180.04 1647.5,2239.96 2042.5,2239.96 2072.5,2269.96 2502.15,2269.96 2542.15,2309.96 L5.4
NetL5_2: L5.2 L6.4 | length 1089.2
  Top Layer w9: L5.2 2430.08,2180.04 2490,2239.96 2885,2239.96 2915,2269.96 3344.65,2269.96 3384.65,2309.96 L6.4
NetL6_2: L6.2 L7.4 | length 1782.4
  Top Layer w9: L7.4 1723.27,1794.98 1736.48,1808.2 1736.48,2031.48 1850,2145 3155,2145 3176.82,2166.82 3190.33,2166.82 L6.2
NetL7_2: L7.2 L8.4 | length 1089.2
  Top Layer w9: L7.2 1587.58,1665.06 1625.02,1702.5 2020.02,1702.5 2072.5,1754.98 2502.15,1754.98 2542.15,1794.98 L8.4
NetL8_2: L8.2 L9.4 | length 1089.2
  Top Layer w9: L8.2 2430.08,1665.06 2490,1724.98 2885,1724.98 2915,1754.98 3344.65,1754.98 3384.65,1794.98 L9.4
NetL9_2: L9.2 L10.4 | length 1647.5
  Top Layer w9: L10.4@1711.46,1289.94 1759.96,1289.94 2085,1614.98 3015,1614.98 3065.08,1665.06 L9.2
NetL10_2: L10.2 L11.4 | length 1089.2
  Top Layer w9: L10.2 1587.58,1155.05 1647.5,1214.97 2042.5,1214.97 2072.5,1244.97 2502.15,1244.97 2542.15,1284.97 L11.4
NetL11_2: L11.2 L12.4 | length 1089.2
  Top Layer w9: L11.2 2430.08,1155.05 2490,1214.97 2885,1214.97 2915,1244.97 3344.65,1244.97 3384.65,1284.97 L12.4
NetL12_2: L12.2 L13.4 | length 1647.5
  Top Layer w9: L13.4@1711.46,779.93 1759.96,779.93 2085,1104.97 3015,1104.97 3065.08,1155.05 L12.2
NetL13_2: L13.2 L14.4 | length 1126.5
  Top Layer w9: L13.2 1611.77,645.04 1656.81,600 2230,600 2370,740 2507.19,740 2542.15,774.96 L14.4
NetL14_2: L14.2 L15.4 | length 1126.5
  Top Layer w9: L14.2 2454.27,645.04 2499.31,600 3072.5,600 3212.5,740 3349.69,740 3384.65,774.96 L15.4
NetLED1_1: LED1.1 R1.1 | length 109.9
  Bottom Layer w20: LED1.1 R1.1
NetLED1_2: LED1.2 U1.18 | length 1612.3
  Bottom Layer w10: U1.18@2029.37,1766.35 2029.37,1743.6 2059.49,1713.49 3360.57,1713.49 3533.03,1885.94 LED1.2
NetR2_1: R2.1 U1.44 | length 233.4
  Bottom Layer w8: U1.44 2049.06,2279.06 2061.85,2291.85 R2.1
Servo1: J1.2 U1.10 | length 1847.3
  +5 w10: J1.2 2270,283.89 v1(2270,1920)
  Bottom Layer w8: U1.10 2234.57,1884.57 v1(2270,1920)
Servo2: J1.3 U1.11 | length 1956.5
  +5 w10: v1(2340,1920) 2340,1855 2380,1815 2380,580 2425,535 2425,273.93 J1.3
  Bottom Layer w8: U1.11 2263.97,1864.88 2290.09,1891 2311,1891 v1(2340,1920)
Servo3: J1.4 U1.12 | length 2018.3
  +5 w10: v1(2405,1920) 2405,595 2455,545 2455,281.43 J1.4
  Bottom Layer w8: U1.12 2269.74,1845.2 2297.54,1873 2358,1873 v1(2405,1920)
Servo4: J1.5 U1.13 | length 2177
  +5 w10: v1(2455,1885) 2455,1840 2425,1810 2425,670 2600,495 2600,301.39 J1.5
  Bottom Layer w8: U1.13 2127.8,1820.09 2128.65,1820.94 2130.94,1820.94 2135,1825 2275,1825 2305,1855 2365.67,1855 2380.67,1870 2440,1870 v1(2455,1885)
SWCLK: P1.3 U1.37 | length 1181.2
  Bottom Layer w8: U1.37 1911.26,2481.26 2457.32,3027.32 2486.07,3027.32 P1.3
SWDIO: P1.2 U1.34 | length 1319.3
  Bottom Layer w8: U1.34 1807.64,2022.36 1795,2035 1795,2395 2392.49,2992.49 2392.49,3033.74 P1.2
pads on no net: J1.9 J1.None L15.2 U1.2 U1.3 U1.4 U1.7 U1.14 U1.15 U1.21 U1.22 U1.25 U1.26 U1.27 U1.28 U1.29 U1.30 U1.31 U1.38 U1.39 U1.40 U1.41 U1.42 U1.43 U1.45 U1.46 U3.5
copper on no net:
  other v2: 1430,130 3495,130 1435,2990 3495,2995

## Polygon pours and split planes (outlines as drawn)
3V3 on Bottom Layer "3V3_L04_P002" (solid, remove dead copper, pour order 2): 3070,2395 1515,2395 1515,1295 3070,1295
no net on Bottom Layer "NONET_L04_P001" (solid, pour order 1): 1915,2560
no net on Bottom Layer "NONET_L04_P000" (solid, pour order 0): 1755,2195
+5 on +5 "+5_L02_P007" (solid, pour order 7): 1275,3135 3640,3135 3640,5 3645,0 1275,0
no net on +5 "NONET_L02_P008" (solid, pour order 8): 1505,2005
GND on GND "GND_L03_P009" (solid, pour order 9): 1270,3140 1275,3135 1275,0 3645,0 3645,3135

## Silkscreen, mask and mechanical layers (free items; w line width, h text height)
Top Overlay:
  lines w10: 1540,2750 1595,2805 ; 3225,725 3280,780
Bottom Overlay:
  circle w10: c2031.15,210 r66.5
  lines w10: 2196.11,460 2196.11,511.11 2210,525 2330,525 ; 2361.07,460 2361.07,511.07 2375,525 2510,525 ; 2691.39,460 2691.39,516.39 2710,535 3095,535
  text "Z.A. 10.14.2019 V1.1" at 3615,3080.66 h60
  text "LED OVERRIDE" at 3097.59,545.66 h60
  text "AUX1" at 2335.35,535.66 h60
  text "AUX2" at 2512.37,535.66 h60
  text "CANL" at 1938.47,445.66 h60
  text "GND" at 3038.47,440.66 h60
  text "CANH" at 1944.92,195.66 h60
  text "12V" at 3014.17,190 h60
  text "S1" at 2218.35,65.66 h60
  text "S2" at 2393.71,65.66 h60
  text "S3" at 2562.44,65.66 h60
  text "S4" at 2730.62,65.66 h60